# EAGLE board circuit (EAGLE 6.3)
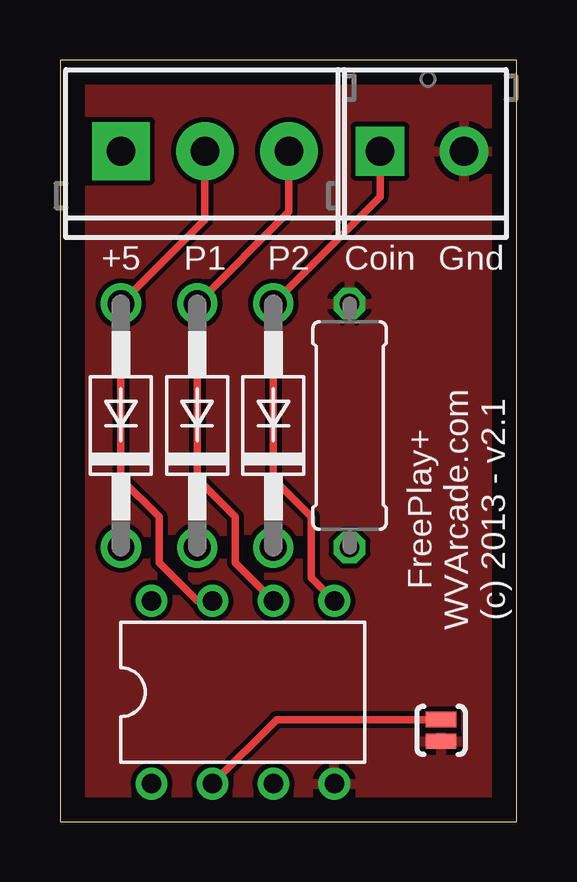
[diagram p0: board, top side]
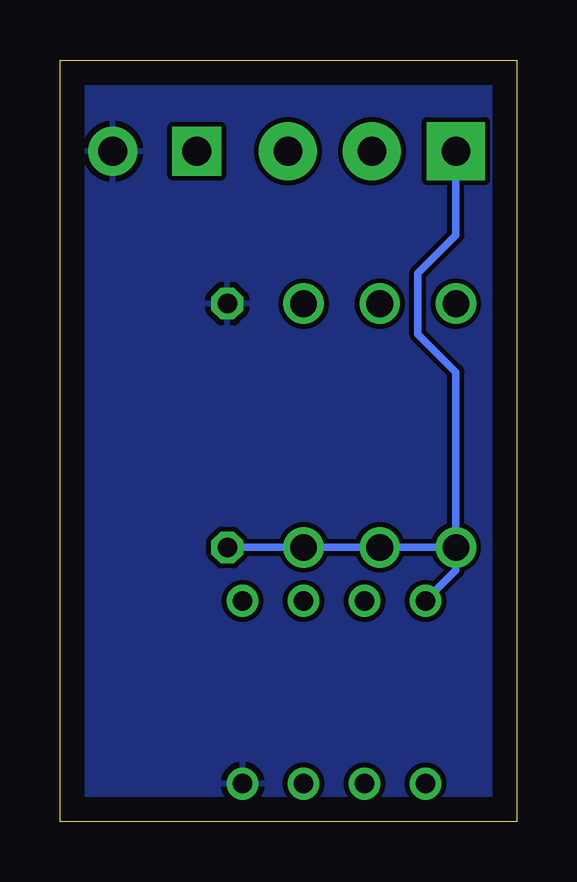
[diagram p1: board, bottom side, seen from below]

Size 19.04 x 31.74 mm. Coordinates in mm from the lower left corner, seen from the top.
Outline: 0,0 19.04,0 19.04,31.74 0,31.74 0,0
Copper layers (1*16): Top 0.035mm / dielectric 1.5mm / Bottom 0.035mm
Design rules "default": minimum track width 10mil, minimum drill 24mil, track to track 8mil, track to pad 8mil, pad to pad 8mil, via to via 8mil, smd to smd 8mil, copper to edge 40mil, drill to drill 8mil, minimum pad ring 10mil, minimum via ring 8mil, stop-mask expansion 4mil, vias tented up to drill 0mil, thermal gap 10mil
Net classes: 0 default: width 0.152 mm, drill 0.152 mm, clearance 0.152 mm

## Footprints (pad centres in the part's own frame; a part is rotated, then mirrored left to right if it is on the bottom)
DO41-10 = drill 1.118: A 5.08,0; C -5.08,0
SCREWTERMINAL-3.5MM-2 = drill 1.2 pad 2.032 square: 1 0,0 | drill 1.2 pad 2.032: 2 3.5,0
SCREWTERMINAL-3.5MM-3 = drill 1.2 pad 2.413 square: 1 0,0 | drill 1.2 pad 2.413: 2 3.5,0; 3 7,0
0309/10 = drill 0.813 octagon: 1 -5.08,0; 2 5.08,0
SJ_2S-NO = smd 0.635 x 1.27: 1 -0.45,0; 2 0.45,0
PDIP08_300MIL = drill 0.813: 1 -3.81,-3.81; 2 -1.27,-3.81; 3 1.27,-3.81; 4 3.81,-3.81; 5 3.81,3.81; 6 1.27,3.81; 7 -1.27,3.81; 8 -3.81,3.81

## Placement (x,y rotation side)
D1  1N4004  [DO41-10]  2.54,16.51 90 top
D2  1N4004  [DO41-10]  5.71,16.51 90 top
D3  1N4004  [DO41-10]  8.89,16.51 90 top
JP1  [SCREWTERMINAL-3.5MM-2]  13.34,27.94 0 top
JP2  [SCREWTERMINAL-3.5MM-3]  2.54,27.94 0 top
R1  1M  [0309/10]  12.06,16.51 270 top
SJ1  SOLDERJUMPERNO  [SJ_2S-NO]  15.88,3.81 90 top
U1  [PDIP08_300MIL]  7.62,5.4 0 top

## Library data of the parts
D1-D3 = diode; MF: FAIRCHILD SEMICONDUCTOR; MPN: 1N4004; OC_NEWARK: 18C8917
JP1 JP2 = SparkFun-Connectors
R1 = resistor; MF: FARNELL; MPN: MF12 1M; OC_NEWARK: 38K5403
SJ1 = SparkFun-Passives
U1 = Atmel ATtiny; MPN: ATTINY45-20PU; OC_NEWARK: 68T3729

## Nets
COIN: D3.A JP1.1 U1.5
GND: JP1.2 R1.1 SJ1.1 U1.4
N$7: SJ1.2 U1.2
P1: D1.A JP2.2 U1.7
P2: D2.A JP2.3 U1.6
VCC: D1.C D2.C D3.C JP2.1 R1.2 U1.8

## Tracks (layer width: path | path; a pad name or v marks a point on that pad's centre or on a via)
COIN
  Top 0.305: JP1.1 13.34,26.04 D3.A 8.89,14.29 10.48,12.7 10.48,10.16 U1.5
GND
  pour Bottom: -0.64,32.39 19.68,32.39 19.68,-0.64 -0.64,-0.64
  pour Top: -0.64,32.39 -0.64,-0.64 19.68,-0.64 19.68,32.39
N$7
  Top 0.305: SJ1.2 9.02,4.26 U1.2
P1
  Top 0.305: JP2.2 6.04,25.09 D1.A 2.54,14.29 4.13,12.7 4.13,10.79 5.71,9.21 U1.7
P2
  Top 0.305: JP2.3 9.54,25.41 D2.A 5.71,14.29 7.3,12.7 7.3,10.79 U1.6
VCC
  Bottom 0.305: R1.2 D3.C D2.C D1.C | D1.C 2.54,10.48 U1.8 | D1.C 2.54,18.73 4.13,20.32 4.13,22.86 2.54,24.45 JP2.1

## Text on the board
tNames: +5 | P1 | P2 | Coin | Gnd | FreePlay+ / WVArcade.com / (c) 2013 - v2.1